# EAGLE board source_eagle (EAGLE 9.6.2)
REV: A
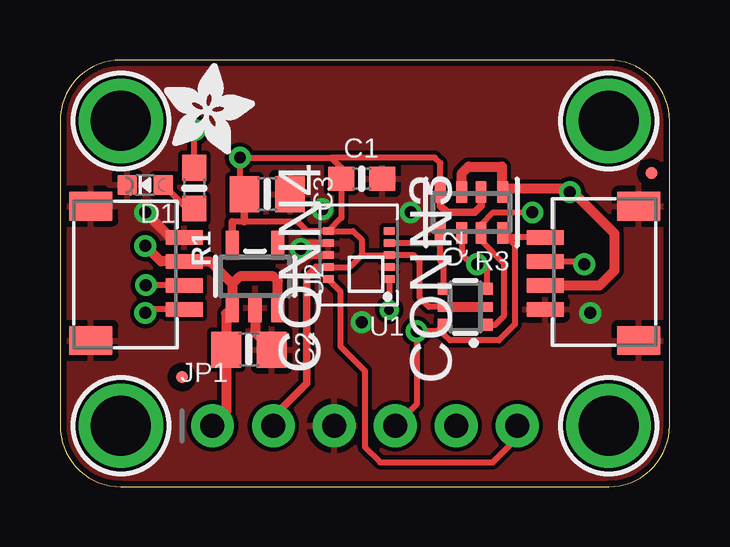
[diagram p0: board, top side]
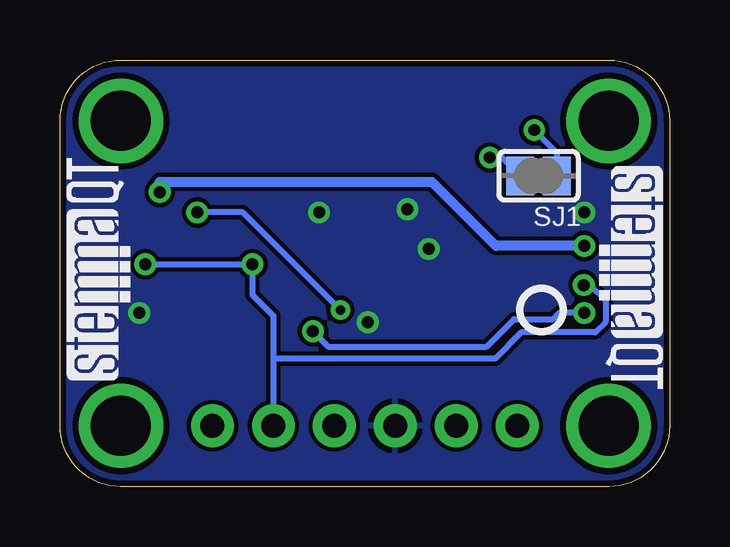
[diagram p1: board, bottom side, seen from below]

Size 25.4 x 17.78 mm. Coordinates in mm from the lower left corner, seen from the top.
Outline: 0,15.24 0,2.54 arc90 2.54,0 22.86,0 arc90 25.4,2.54 25.4,15.24 arc90 22.86,17.78 2.54,17.78 arc90 0,15.24
Copper layers (1*16): Top 0.035mm / dielectric 1.5mm / Bottom 0.035mm
Design rules "adafruit 7-7": minimum track width 7mil, minimum drill 15.5mil, track to track 7mil, track to pad 7mil, pad to pad 7mil, via to via 7mil, smd to smd 7mil, copper to edge 10mil, drill to drill 8mil, minimum pad ring 10mil, minimum via ring 8mil, stop-mask expansion 2mil, vias tented up to drill 20mil, thermal gap 10mil
Net classes: 1 highpower: width 0.305 mm, drill 0.483 mm; 2 lowpower: width 0.254 mm, drill 0.483 mm

## Footprints (pad centres in the part's own frame; a part is rotated, then mirrored left to right if it is on the bottom)
0603-NO = smd 1.075 x 1: 1 -0.85,0; 2 0.85,0
0805-NO = smd 1.24 x 1.5: 1 -0.95,0; 2 0.95,0
JST_SH4 = smd 0.6 x 1.55: 1 -1.5,2.006; 2 -0.5,2.006; 3 0.5,2.006; 4 1.5,2.006 | smd 1.2 x 1.8: MT1 -2.8,-1.894; MT2 2.8,-1.894
CHIPLED_0603_NOOUTLINE = smd 0.8 x 0.8: A 0,-0.75; C 0,0.75
FIDUCIAL_0.5MM = smd 0.5 x 0.5: 1 0,0
1X06_ROUND_70 = drill 1 pad 1.778: 1 -6.35,0; 2 -3.81,0; 3 -1.27,0; 4 1.27,0; 5 3.81,0; 6 6.35,0
SOT363 = smd 0.5 x 0.5: 1 -0.75,-0.9; 3 0.75,-0.9; 4 0.75,0.9; 6 -0.75,0.9 | smd 0.4 x 0.5: 2 0,-0.9; 5 0,0.9
RESPACK_4X0603 = smd 0.45 x 0.9: 1 -1.3,-0.85; 2 -0.4,-0.85; 3 0.4,-0.85; 4 1.3,-0.85; 5 1.3,0.85; 6 0.4,0.85; 7 -0.4,0.85; 8 -1.3,0.85
SOLDERJUMPER_CLOSEDWIRE = smd 1.168 x 1.6: 1 -0.762,0; 2 0.762,0 | smd 0.635 x 0.203: WIRE 0,0
XDCR_STHS34PF80TR = smd 0.45 x 0.3: 1 -1.275,1; 2 -1.275,0.5; 3 -1.275,0; 4 -1.275,-0.5; 5 -1.275,-1; 6 1.275,-1; 7 1.275,-0.5; 8 1.275,0; 9 1.275,0.5; 10 1.275,1
SOT23-5 = smd 0.55 x 1.2: 1 -0.95,-1.3; 2 0,-1.3; 3 0.95,-1.3; 4 0.95,1.3; 5 -0.95,1.3
MOUNTINGHOLE_2.5_PLATED = drill 2.5 pad 3.2: P$1 0,0

## Placement (x,y rotation side)
C1  0.1uF  [0603-NO]  12.57,12.83 0 top
C2  10uF  [0805-NO]  7.87,5.71 0 top
C3  10uF  [0805-NO]  8.64,12.19 0 top
CONN3  STEMMA_I2C_QT  [JST_SH4]  22.23,8.89 90 top
CONN4  STEMMA_I2C_QT  [JST_SH4]  3.17,8.89 270 top
D1  GREEN  [CHIPLED_0603_NOOUTLINE]  3.56,12.57 90 top
FID3  FIDUCIAL_0.5MM  [FIDUCIAL_0.5MM]  5.08,4.57 0 top
FID4  FIDUCIAL_0.5MM  [FIDUCIAL_0.5MM]  24.64,13.08 0 top
JP1  [1X06_ROUND_70]  12.7,2.54 0 top
PLABEL0  [PLABEL0]  6.35,0.89 0 top
PLABEL1  [PLABEL1]  8.89,4.19 0 top
PLABEL2  [PLABEL2]  11.43,0.89 0 top
PLABEL3  [PLABEL3]  13.97,4.19 0 top
PLABEL4  [PLABEL4]  16.64,0.89 0 top
PLABEL5  [PLABEL5]  19.05,4.19 0 top
PLABEL6  [PLABEL6]  14.48,16.51 0 top
PLABEL7  [PLABEL7]  14.1,14.61 0 top
PLABEL8  [PLABEL8]  0.38,12.45 0 top
PLABEL9  [PLABEL9]  12.7,15.88 0 bottom
PLABEL10  [PLABEL10]  21.34,8.89 0 bottom
PLABEL11  [PLABEL11]  12.7,1.02 0 bottom
PLABEL12  [PLABEL12]  5.33,11.18 0 bottom
Q2  BSS138  [SOT363]  16.89,7.49 90 top
R1  10K  [0603-NO]  5.59,12.45 270 top
R3  10K Pack  [RESPACK_4X0603]  17.14,11.43 180 top
SJ1  [SOLDERJUMPER_CLOSEDWIRE]  5.46,12.95 180 bottom
U1  STHS34PF80TR  [XDCR_STHS34PF80TR]  12.45,9.65 180 top
U2  AP2127K-3.3  [SOT23-5]  8.13,8.76 0 top
U$1  MOUNTINGHOLE2.5  [MOUNTINGHOLE_2.5_PLATED]  2.54,15.24 0 top
U$17  MOUNTINGHOLE2.5  [MOUNTINGHOLE_2.5_PLATED]  22.86,15.24 0 top
U$19  MOUNTINGHOLE2.5  [MOUNTINGHOLE_2.5_PLATED]  2.54,2.54 0 top
U$21  MOUNTINGHOLE2.5  [MOUNTINGHOLE_2.5_PLATED]  22.86,2.54 0 top
U$22  [ADAFRUIT_3.5MM]  4.32,13.84 0 top
U$25  [PCBFEAT-REV-040]  5.33,7.37 0 bottom
U$30  [STEMMAQT]  22.48,4.45 90 bottom
U$31  [STEMMAQT]  2.92,13.34 270 bottom

## Library data of the parts
C1-C3 FID3 FID4 JP1 R1 R3 SJ1 U$22 U$25 = microbuilder
CONN3 CONN4 = adafruit_electromech; LCSC: C2845363
D1 = microbuilder; ROT: 270
PLABEL0 PLABEL1-PLABEL12 = pinguin
Q2 = microbuilder; JLC_ROTATION: 270
U1 = adafruit_sensor; MANUFACTURER: STmicroelectronics; MAXIMUM_PACKAGE_HEIGHT: 1.455mm; PARTREV: 2; ROT: 270; SNAPEDA_PN: STHS34PF80TR; STANDARD: Manufacturer Recommendations
U2 = adafruit_power; JLC_ROTATION: 270
U$1 U$17 U$19 U$21 = adafruit_electromech; BOM: EXCLUDE
U$30 U$31 = silks

## Nets
3.3V [lowpower]: C1.1 C3.1 JP1.2 Q2.2 Q2.5 R3.2 R3.4 SJ1.2 U1.3 U1.6 U1.9 U2.5
GND [highpower]: C1.2 C2.2 C3.2 CONN3.1 CONN3.MT1 CONN3.MT2 CONN4.1 CONN4.MT1 CONN4.MT2 D1.C JP1.3 U1.2 U1.7 U1.8 U2.2
INT: JP1.6 U1.10
N$1: D1.A R1.2
N$2 [lowpower]: R1.1 SJ1.1
SCL: CONN3.4 CONN4.4 JP1.4 Q2.6 R3.8
SCL_3V: Q2.1 R3.7 U1.1
SDA: CONN3.3 CONN4.3 JP1.5 Q2.3 R3.6
SDA_3V: Q2.4 R3.5 U1.4
VCC [highpower]: C2.1 CONN3.2 CONN4.2 JP1.1 R3.1 R3.3 U2.1 U2.3

## Tracks (layer width: path | path; a pad name or v marks a point on that pad's centre or on a via)
3.3V  (via drill 0.48)
  Top 0.254: C3.1 7.49,12.38 v7.49,13.72 11.3,13.72 | U1.6 10.3,10.65 9.91,11.05 7.69,11.05 7.18,11.05 | U1.9 12.07,9.15 12.57,9.65 | 12.57,9.65 U1.3 14.73,9.65 14.99,9.4 14.99,7.87 15.37,7.49 Q2.5 | U1.6 12.21,10.65 12.57,10.29 12.57,9.65 | U1.6 11.72,11.2 C1.1 11.72,13.3 11.3,13.72 | R3.4 15.85,13.49 15.62,13.72 11.3,13.72
  Top 0.305: R3.2 17.55,11.7 17.27,11.43 16.13,11.43 15.85,11.71 R3.4 | C3.1 7.69,11.05 | 7.18,11.05 U2.5 | JP1.2 8.89,2.92 10.29,4.32 10.29,8.76 10.68,9.15 U1.9
  Top 0.406: Q2.5 Q2.2
  Bottom 0.254: v7.49,13.72 6.99,13.72 SJ1.2
GND  (via drill 0.5)
  Top 0.305: U1.8 10.16,9.65 10.16,9.53 10.03,9.65 v10.03,9.91 10.03,10.16 10.04,10.15 U1.7
  Top 0.406: U2.2 8.13,6.41 C2.2 | CONN4.1 4.6,10.39 v3.56,11.43
  other vias: 22.1,7.24 14.61,11.43 12.57,6.86 10.92,11.56
  pour Top: 0,17.78 25.4,17.78 25.4,0 0,0
  pour Bottom: 0,17.78 25.4,17.78 25.4,0 0,0
INT
  Top 0.254: JP1.6 19.05,2.03 18.03,1.02 13.34,1.02 12.7,1.65 12.7,4.83 11.68,5.85 11.68,8.14 U1.10
N$1
  Top 0.254: D1.A 5.28,11.6 R1.2
N$2  (via drill 0.48)
  Top 0.254: R1.1 5.59,14.81 v5.64,14.86
  Bottom 0.254: v5.64,14.86 4.7,13.92 SJ1.1
SCL  (via drill 0.5)
  Top 0.254: CONN3.4 18.64,10.39 R3.8 18.95,10.07 18.95,6.76 18.29,6.1 16.26,6.1 15.99,6.36 Q2.6 15.72,6.48 v14.86,6.48 14.86,3.43 JP1.4 | CONN4.4 3.71,7.39 v3.56,7.24
  Bottom 0.254: v14.86,6.48 14.22,5.84 7.62,5.84 6.48,6.99 4.85,6.99 4.59,7.24 v3.56,7.24
SCL_3V  (via drill 0.4, 0.5)
  Top 0.254: v19.68,11.43 18.03,11.43 17.55,10.94 R3.7 17.55,10.27 18.5,9.32 18.5,7.11 18.13,6.74 Q2.1 | U1.1 v13.72,7.37
  Bottom 0.254: v13.72,7.37 17.78,11.43 v19.68,11.43
SDA  (via drill 0.5)
  Top 0.254: R3.6 16.75,9.69 17.16,9.27 v17.38,9.27 17.38,9.13 17.79,9.13 Q2.3 | CONN4.3 v3.58,8.39 v3.58,8.4 | CONN3.3 21.73,9.39 v21.84,9.27
  Bottom 0.254: v3.58,8.4 3.33,8.4 2.67,7.75 2.67,6.86 3.1,6.43 6.18,6.43 7.27,5.33 16.51,5.33 | v21.84,9.27 v17.38,9.27 17.38,8 16.51,7.13 16.51,5.33 | 16.51,5.33 JP1.5
SDA_3V
  Top 0.254: Q2.4 15.99,9.26 15.85,9.4 15.85,10.16 | 15.85,10.16 R3.5 | U1.4 15.85,10.16
VCC  (via drill 0.5)
  Top 0.406: R3.3 16.75,13.06 17.02,13.34 18.41,13.34 18.41,12.31 R3.1 18.57,12.41 21.12,12.41 v21.25,12.28 21.38,12.28 23.11,10.54 23.11,9.02 22.49,8.39 CONN3.2 | U2.3 9.08,8.57 8.89,8.76 7.49,8.76 7.18,8.45 | 7.18,8.45 U2.1 6.92,7.21 C2.1 6.92,3.11 JP1.1 | 7.18,8.45 6.24,9.39 CONN4.2 4.2,9.39 v3.56,10.03
  Bottom 0.406: v21.25,12.28 21.25,12.7 9.91,12.7 7.24,10.03 v3.56,10.03

## Text on the board
Pinguin_tBackup: STHS34PF80 | IR Presence/Motion | on | 3Vo | SCL | INT | VIN | GND | SDA
Pinguin_bBackup: STHS34PF80 | LED | Low-power / high-sensitivity / infrared sensor / presence and / motion detection | VLogic/Vcc: 3-5VDC